# EAGLE board Arduino Uno (EAGLE 6.6.0)

Size 68.58 x 63.5 mm. Coordinates in mm from the lower left corner, seen from the top.
Copper layers (1*16): Top 0.035mm / dielectric 1.5mm / Bottom 0.035mm
Design rules "default": minimum track width 10mil, minimum drill 24mil, track to track 8mil, track to pad 8mil, pad to pad 8mil, via to via 8mil, smd to smd 8mil, copper to edge 40mil, drill to drill 8mil, minimum pad ring 10mil, minimum via ring 8mil, stop-mask expansion 4mil, vias tented up to drill 0mil, thermal gap 10mil

## Footprints (pad centres in the part's own frame; a part is rotated, then mirrored left to right if it is on the bottom)
ARDUINO_UNO_RAW = drill 1.016 pad 1.88: 0 29.21,25.4; 1 26.67,25.4; 2 24.13,25.4; 3 21.59,25.4; 3.3V 1.27,-22.86; 4 19.05,25.4; 5 16.51,25.4; 5V 3.81,-22.86; 6 13.97,25.4; 7 11.43,25.4; 8 7.366,25.4; 9 4.826,25.4; 10 2.286,25.4; 11 -0.254,25.4; 12 -2.794,25.4; 13 -5.334,25.4; A0 16.51,-22.86; A1 19.05,-22.86; A2 21.59,-22.86; A3 24.13,-22.86; A4 26.67,-22.86; A5 29.21,-22.86; AREF -10.414,25.4; GND -7.874,25.4; GND. 8.89,-22.86; GND.. 6.35,-22.86; I/OREF -3.81,-22.86; N/C -6.35,-22.86; RESET -1.27,-22.86; SCL -15.494,25.4; SDA -12.954,25.4; VIN 11.43,-22.86 | smd 0.711 x 1.422 bottom: 0@1 29.21,23.114; 1@1 26.67,23.114; 2@1 24.13,23.114; 3.3V@1 1.27,-20.574; 3@1 21.59,23.114; 4@1 19.05,23.114; 5@1 16.51,23.114; 5V@1 3.81,-20.574; 6@1 13.97,23.114; 7@1 11.43,23.114; 8@1 7.366,23.114; 9@1 4.826,23.114; 10@1 2.286,23.114; 11@1 -0.254,23.114; 12@1 -2.794,23.114; 13@1 -5.334,23.114; A0@1 16.51,-20.574; A1@1 19.05,-20.574; A2@1 21.59,-20.574; A3@1 24.13,-20.574; A4@1 26.67,-20.574; A5@1 29.21,-20.574; AREF@1 -10.414,23.114; GND..@1 6.35,-20.574; GND.@1 8.89,-20.574; GND@1 -7.874,23.114; I/OREF@1 -3.81,-20.574; N/C@1 -6.35,-20.574; RESET@1 -1.27,-20.574; SCL@1 -15.494,23.114; SDA@1 -12.954,23.114; VIN@1 11.43,-20.574 | smd 0.711 x 1.422: 0@2 29.21,23.114; 1@2 26.67,23.114; 2@2 24.13,23.114; 3.3V@2 1.27,-20.574; 3@2 21.59,23.114; 4@2 19.05,23.114; 5@2 16.51,23.114; 5V@2 3.81,-20.574; 6@2 13.97,23.114; 7@2 11.43,23.114; 8@2 7.366,23.114; 9@2 4.826,23.114; 10@2 2.286,23.114; 11@2 -0.254,23.114; 12@2 -2.794,23.114; 13@2 -5.334,23.114; A0@2 16.51,-20.574; A1@2 19.05,-20.574; A2@2 21.59,-20.574; A3@2 24.13,-20.574; A4@2 26.67,-20.574; A5@2 29.21,-20.574; AREF@2 -10.414,23.114; GND..@2 6.35,-20.574; GND.@2 8.89,-20.574; GND@2 -7.874,23.114; I/OREF@2 -3.81,-20.574; N/C@2 -6.35,-20.574; RESET@2 -1.27,-20.574; SCL@2 -15.494,23.114; SDA@2 -12.954,23.114; VIN@2 11.43,-20.574 | hole 3.2: 31.75,-17.78; 31.75,10.16; -19.05,25.4; -20.32,-22.86

## Placement (x,y rotation side)
E$2  [ARDUINO_UNO_RAW]  34.29,30.48 0 top

## Library data of the parts
E$2 = voltera_EAGLE_community_lib